# Altium PCB LMC-PWR-001.PcbDoc
Units mil, origin at the board's own origin, x right, y up, seen from the top; angles counter-clockwise.
Board outline 4900 x 600 mil, 2 copper layers (Top Layer, Bottom Layer); 3 components, 4 nets, 17 pads, 20 vias.
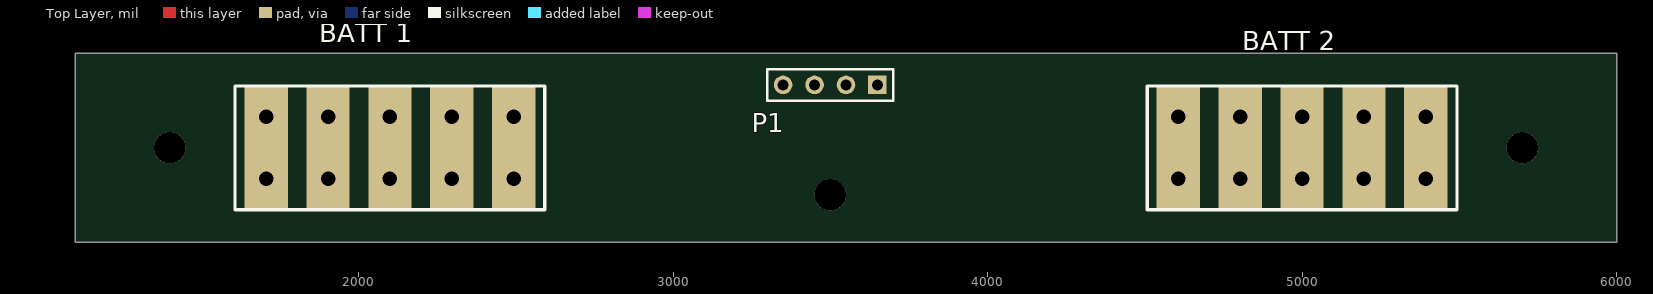
[diagram p0: Top Layer view]
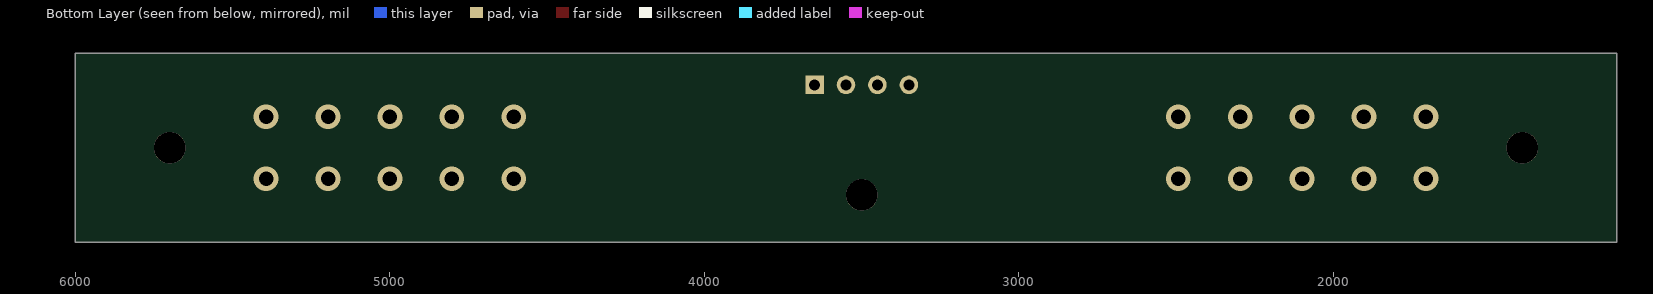
[diagram p1: Bottom Layer view, seen from below]

## Layer stack, top to bottom
Top Solder: solder mask 0.4, Solder Resist, Dk 3.5
Top Layer: signal copper 1.4
Dielectric 1: dielectric 12.6, FR-4, Dk 4.8
Bottom Layer: signal copper 1.4
Bottom Solder: solder mask 0.4, Solder Resist, Dk 3.5

## Board outline
1100,1200 6000,1200 6000,1800 1100,1800

## Design rules (kind name [scope] priority, off if disabled: settings)
Clearance [All] p1: gap=10 ignorepadtopadclearanceinfootprint=FALSE except(0: Arc-Hole Track-Hole SMDPad-Hole THPad-Hole Via-Hole Fill-Hole Poly-Hole Region-Hole Text-Hole)
PolygonConnect [All] p1: connectstyle=Relief reliefconductorwidth=10 reliefentries=4 polygonreliefangle="90 Angle" airgapwidth=10
RoutingVias [All] p1: holewidth=28 width=50 viastyle="Through Hole" minholewidth=28 minwidth=50 maxholewidth=28 maxwidth=50
SolderMaskExpansion [All] p1: expansion=4
Width [All] p1: maxlimit=10 minlimit=10 preferedwidth=10
30 further rules are at their usual default settings.

## Components (designator, comment, footprint, x,y, rotation, side; value= is the part's Value field where it differs from the comment)
"BATT 1" "5787446-1" 787446-1 2100,1500 r180 top
"BATT 2" "5787446-1" 787446-1 5000,1500 r180 top
P1 "Header 4" HDR1X4 3650,1700 r180 top

## Footprints (in the part's own frame and the unit in brackets; to place one, negate y for a bottom-side part, rotate by r counter-clockwise, add the part's x,y. Pads: shape width x height; smd on the part's side, far side on the other; paste and mask are expansions set on the pad)
787446-1 [mm] "CONN HDR 5POS 5.00MM KINKED PIN"
  rect 3.5x10 smd: 1(-10,0) 2(-5,0) 3(0,0) 4(5,0) 5(10,0)
  silkscreen extent -12.5,-5 12.5,5, body extent -13.51,-4.9 13.51,4.9, height 8.95
HDR1X4 [mm] "Connector; Header; 4 Position"
  rect 1.5x1.5 hole 0.9: 1(0,0)
  round 1.5 hole 0.9: 2(2.54,0) 3(5.08,0) 4(7.62,0)
  silkscreen extent -1.27,-1.27 8.89,1.27

## Part data
"BATT 1" "BATT 2": library part "Header 5", "CONN HDR 5POS 5.00MM KINKED PIN", Color=Black, Manufacturer="TE Connectivity AMP Connectors", Operating Temperature="-30°C ~ 70°C", Supplier Part Number 1=5787446-1-ND, Category="Connectors, Interconnects", ComponentLink1Description=http://www.te.com/commerce/DocumentDelivery/DDEController?Action=srchrtrv&DocNm=5787446&DocType=Customer+Drawing&DocLang=English, ComponentLink1URL=http://www.te.com/commerce/DocumentDelivery/DDEController?Action=srchrtrv&DocNm=5787446&DocType=Customer+Drawing&DocLang=English, Connector Style=Battery, Connector Type="Header, Male Blades", Contact Finish=Nickel, Contact Finish Thickness="74.8µin (1.90µm)", Contact Material=Brass, Fastening Type=Push-Pull, Features=Keyless, Manufacturer Part Number=5787446-1, Material - Insulation="Polyphthalamide (PPA)", Mounting Type="Through Hole", Packaging=Bulk, Part Status=Active, Pitch="0.197\" (5.00mm)", Pricing 1="1=3.48, 10=3.339, 120=2.78225, 600=2.36492, 1080=2.01714, 5040=1.80847 (USD)", RoHS="RoHS Compliant", Row Spacing=-, Stock 1=7048, Supplier 1=Digi-Key, Termination="Kinked Pin", Wire Gauge=-
P1: "Header, 4-Pin", LatestRevisionDate=17-Jul-2002, LatestRevisionNote="Re-released for DXP Platform.", Publisher="Altium Limited"

## Free pads (board coordinates)
  round 100 hole 100: 8(1400,1500) 8(3500,1350) 8(5700,1500)

## Via types
v1: diameter 78.74, hole 45.98, Top Layer to Bottom Layer, 20 vias

## Nets (pads, with @x,y where several pads share a name; then routed paths per layer and width w, separated by ;. In a path a pad name is that pad's centre, name@x,y a point inside that pad or via, vN(x,y) a via of type N, cw(c..) or ccw(c..) an arc to the next point about the centre after c; other vN are vias at no path point)
"NetBATT 1_1": "BATT 1.1" P1.1
  other v1: 2493.7,1401.58 2493.7,1598.43
"NetBATT 1_2": "BATT 1.2" P1.2
  other v1: 2296.85,1401.58 2296.85,1598.43
"NetBATT 2_1": "BATT 2.1" P1.4
  other v1: 5393.7,1401.58 5393.7,1598.43
"NetBATT 2_2": "BATT 2.2" P1.3
  other v1: 5196.85,1401.58 5196.85,1598.43
pads on no net: "BATT 1.3" "BATT 1.4" "BATT 1.5" "BATT 2.3" "BATT 2.4" "BATT 2.5"
copper on no net:
  other v1: 1706.3,1401.58 1903.15,1401.58 2100,1401.58 4606.3,1401.58 4803.15,1401.58 5000,1401.58 1706.3,1598.43 1903.15,1598.43 2100,1598.43 4606.3,1598.43 4803.15,1598.43 5000,1598.43